# EAGLE board CT_schematic (EAGLE 7.6.0)

Size 100 x 80 mm. Coordinates in mm from the lower left corner, seen from the top.
Outline: 0,0 100,0 100,80 0,80 0,0
Copper layers (1*16): Top 0.035mm / dielectric 1.5mm / Bottom 0.035mm
Design rules "default": minimum track width 10mil, minimum drill 24mil, track to track 8mil, track to pad 8mil, pad to pad 8mil, via to via 8mil, smd to smd 8mil, copper to edge 40mil, drill to drill 8mil, minimum pad ring 10mil, minimum via ring 8mil, stop-mask expansion 4mil, vias tented up to drill 0mil, thermal gap 10mil

## Footprints (pad centres in the part's own frame; a part is rotated, then mirrored left to right if it is on the bottom)
C0603 = smd 0.8 x 0.8: 1 -0.762,0; 2 0.762,0
C0805 = smd 1.2 x 1.3: 1 -1.016,0; 2 1.016,0
C0402 = smd 0.5 x 0.5: 1 -0.508,0; 2 0.508,0
C1210 = smd 1.2 x 2.5: 1 -1.524,0; 2 1.524,0
EXV-9H = smd 3.505 x 1.676: 1 -2.857,0; 2 2.857,0
L0603 = smd 0.8 x 0.8: 1 -0.762,0; 2 0.762,0
L1210 = smd 1.2 x 2.5: 1 -1.524,0; 2 1.524,0
PJ-037B_PACKAGE = drill 3.7 square: 1 12,0 | drill 3.2 square: 2 6,0
R0603 = smd 0.8 x 0.8: 1 -0.762,0; 2 0.762,0
LQFP64 = smd 0.3 x 1.2: 1 -3.75,-5.75; 2 -3.25,-5.75; 3 -2.75,-5.75; 4 -2.25,-5.75; 5 -1.75,-5.75; 6 -1.25,-5.75; 7 -0.75,-5.75; 8 -0.25,-5.75; 9 0.25,-5.75; 10 0.75,-5.75; 11 1.25,-5.75; 12 1.75,-5.75; 13 2.25,-5.75; 14 2.75,-5.75; 15 3.25,-5.75; 16 3.75,-5.75; 33 3.75,5.75; 34 3.25,5.75; 35 2.75,5.75; 36 2.25,5.75; 37 1.75,5.75; 38 1.25,5.75; 39 0.75,5.75; 40 0.25,5.75; 41 -0.25,5.75; 42 -0.75,5.75; 43 -1.25,5.75; 44 -1.75,5.75; 45 -2.25,5.75; 46 -2.75,5.75; 47 -3.25,5.75; 48 -3.75,5.75 | smd 1.2 x 0.3: 17 5.75,-3.75; 18 5.75,-3.25; 19 5.75,-2.75; 20 5.75,-2.25; 21 5.75,-1.75; 22 5.75,-1.25; 23 5.75,-0.75; 24 5.75,-0.25; 25 5.75,0.25; 26 5.75,0.75; 27 5.75,1.25; 28 5.75,1.75; 29 5.75,2.25; 30 5.75,2.75; 31 5.75,3.25; 32 5.75,3.75; 49 -5.75,3.75; 50 -5.75,3.25; 51 -5.75,2.75; 52 -5.75,2.25; 53 -5.75,1.75; 54 -5.75,1.25; 55 -5.75,0.75; 56 -5.75,0.25; 57 -5.75,-0.25; 58 -5.75,-0.75; 59 -5.75,-1.25; 60 -5.75,-1.75; 61 -5.75,-2.25; 62 -5.75,-2.75; 63 -5.75,-3.25; 64 -5.75,-3.75
SSOP-16 = smd 1.981 x 0.356: 1 -2.464,2.223; 2 -2.464,1.587; 3 -2.464,0.953; 4 -2.464,0.318; 5 -2.464,-0.318; 6 -2.464,-0.953; 7 -2.464,-1.587; 8 -2.464,-2.223; 9 2.464,-2.223; 10 2.464,-1.587; 11 2.464,-0.953; 12 2.464,-0.318; 13 2.464,0.318; 14 2.464,0.953; 15 2.464,1.587; 16 2.464,2.223
HTSS-105-01-G-D = drill 1 pad 1.8 square: 1 0,0 | drill 1 pad 1.8: 2 0,2.54; 3 2.54,0; 4 2.54,2.54; 5 5.08,0; 6 5.08,2.54; 7 7.62,0; 8 7.62,2.54; 9 10.16,0; 10 10.16,2.54
ATBTLC1000-MR110CA = smd 2 x 0.5: 1 -7.2,2.7; 2 -7.2,1.8; 3 -7.2,0.9; 4 -7.2,0; 5 -7.2,-0.9; 6 -7.2,-1.8; 7 -7.2,-2.7; 8 -7.2,-3.6; 17 3.6,-3.6; 18 3.6,-2.7; 19 3.6,-1.8; 20 3.6,-0.9; 21 3.6,0; 22 3.6,0.9; 23 3.6,1.8; 24 3.6,2.7 | smd 0.5 x 2: 9 -4.255,-6.824; 10 -3.355,-6.824; 11 -2.455,-6.824; 12 -1.555,-6.824; 13 -0.655,-6.824; 14 0.245,-6.824; 15 1.145,-6.824; 16 2.045,-6.824 | smd 2.7 x 2.7: 25 -1.261,-0.328
QFN-32 = smd 0.6 x 0.3: 1 -2.3,1.75; 2 -2.3,1.25; 3 -2.3,0.75; 4 -2.3,0.25; 5 -2.3,-0.25; 6 -2.3,-0.75; 7 -2.3,-1.25; 8 -2.3,-1.75; 17 2.3,-1.75; 18 2.3,-1.25; 19 2.3,-0.75; 20 2.3,-0.25; 21 2.3,0.25; 22 2.3,0.75; 23 2.3,1.25; 24 2.3,1.75 | smd 0.3 x 0.6: 9 -1.75,-2.3; 10 -1.25,-2.3; 11 -0.75,-2.3; 12 -0.25,-2.3; 13 0.25,-2.3; 14 0.75,-2.3; 15 1.25,-2.3; 16 1.75,-2.3; 25 1.75,2.3; 26 1.25,2.3; 27 0.75,2.3; 28 0.25,2.3; 29 -0.25,2.3; 30 -0.75,2.3; 31 -1.25,2.3; 32 -1.75,2.3 | smd 3.2 x 3.2: EXP 0,0
SJ-43515TS-SMT-TR = smd 2.2 x 3: 1 0.6,-7.4; 4 3.4,-7.4 | smd 3 x 3: 2 12.8,-7.4; 5 17,-3 | smd 2 x 3: 3 5.3,0; 6 2.5,0 | drill 1.8: P$7 4.5,-3.69; P$8 11.54,-3.69
WM-64PC = drill 0.6 pad 1: 1 -1,0.95; 2 -1,-0.95
USB-A-H = drill 0.914: 1 2.718,3.493; 2 2.718,1.003; 3 2.718,-1.003; 4 2.718,-3.493 | drill 2.311: 5 0,-6.566; 6 0,6.566
SOT143B = smd 1 x 0.7: 1 -0.75,-1 | smd 0.6 x 0.7: 2 0.95,-1; 3 0.95,1; 4 -0.95,1
ASEK = smd 1.4 x 1: 1 -1.1,-0.8; 2 1.1,-0.8; 3 1.1,0.8; 4 -1.1,0.8
ASFL1 = smd 1.7 x 1.5: 1 -1.27,-1.1; 2 1.27,-1.1; 3 1.27,1.1; 4 -1.27,1.1
WSON-8 = smd 0.3 x 0.6: 1 -0.75,0; 2 0.05,0; 3 0.85,0; 4 1.65,0; 5 1.65,3.8; 6 0.85,3.8; 7 0.05,3.8; 8 -0.75,3.8 | smd 3 x 2.6: PAD 0.45,1.9
SON-6 = smd 0.55 x 0.3: 1 -0.355,0.5 | smd 0.52 x 0.3: 2 -0.37,0; 3 -0.37,-0.5; 4 0.37,-0.5; 5 0.37,0; 6 0.37,0.5
SW_4-1437565-2 = smd 1.4 x 2.1: 1 -2.23,4.55; 2 -2.23,-4.55; 3 2.23,4.55; 4 2.23,-4.55
LGM67K-G1J2-24-Z = smd 0.8 x 1.4: A -2,0; C 0,0
NC7SZ125M5X = smd 1.3 x 0.7: 1 -1.3,0.95; 2 -1.3,0; 3 -1.3,-0.95; 4 1.3,-0.95; 5 1.3,0.95

## Placement (x,y rotation side)
C1  1e-06  [C0603]  -67.31,80.01 0 top  (outside the outline)
C2  1e-07  [C0603]  -71.12,80.01 0 top  (outside the outline)
C3  1e-07  [C0603]  -74.93,80.01 0 top  (outside the outline)
C4  1e-07  [C0603]  -78.74,80.01 0 top  (outside the outline)
C5  1e-07  [C0603]  -82.55,80.01 0 top  (outside the outline)
C6  1e-07  [C0603]  -86.36,80.01 0 top  (outside the outline)
C7  4.7e-06  [C0603]  -59.69,80.01 0 top  (outside the outline)
C8  1e-08  [C0603]  -15.24,85.09 0 top  (outside the outline)
C9  1e-06  [C0603]  -19.05,85.09 0 top  (outside the outline)
C10  1e-06  [C0603]  -22.86,85.09 0 top  (outside the outline)
C11  1e-06  [C0603]  -26.67,85.09 0 top  (outside the outline)
C12  2.2e-07  [C0603]  -63.5,80.01 0 top  (outside the outline)
C13  1e-06  [C0603]  -30.48,85.09 0 top  (outside the outline)
C14  1e-06  [C0603]  -34.29,85.09 0 top  (outside the outline)
C15  1e-05  [C0805]  -69.85,72.39 0 top  (outside the outline)
C16  1e-05  [C0805]  -74.93,72.39 0 top  (outside the outline)
C17  1e-06  [C0603]  -38.1,85.09 0 top  (outside the outline)
C18  1e-06  [C0603]  -41.91,85.09 0 top  (outside the outline)
C19  1e-06  [C0603]  -45.72,85.09 0 top  (outside the outline)
C20  1e-06  [C0603]  -49.53,85.09 0 top  (outside the outline)
C21  1e-06  [C0603]  -53.34,85.09 0 top  (outside the outline)
C22  1e-06  [C0603]  -57.15,85.09 0 top  (outside the outline)
C23  1e-06  [C0603]  -60.96,85.09 0 top  (outside the outline)
C24  1e-07  [C0402]  -34.29,90.17 0 top  (outside the outline)
C25  1e-07  [C0402]  -38.1,90.17 0 top  (outside the outline)
C26  1e-07  [C0402]  -41.91,90.17 0 top  (outside the outline)
C27  1e-07  [C0402]  -45.72,90.17 0 top  (outside the outline)
C28  1e-06  [C0603]  -64.77,85.09 0 top  (outside the outline)
C29  1e-08  [C0402]  -49.53,90.17 0 top  (outside the outline)
C30  1e-08  [C0402]  -53.34,90.17 0 top  (outside the outline)
C31  1e-08  [C0402]  -57.15,90.17 0 top  (outside the outline)
C32  1e-08  [C0402]  -60.96,90.17 0 top  (outside the outline)
C33  1e-05  [C1210]  -39.37,72.39 0 top  (outside the outline)
C34  1e-05  [C0805]  -80.01,72.39 0 top  (outside the outline)
C35  1e-08  [C0402]  -64.77,90.17 0 top  (outside the outline)
C36  1e-05  [C1210]  -45.72,72.39 0 top  (outside the outline)
C37  1e-05  [C1210]  -52.07,72.39 0 top  (outside the outline)
C38  1e-07  [C0402]  -68.58,90.17 0 top  (outside the outline)
C39  0.0001  [EXV-9H]  -73.66,63.5 0 top  (outside the outline)
C40  0.0001  [EXV-9H]  -17.78,73.66 0 top  (outside the outline)
C41  1e-08  [C0402]  -72.39,90.17 0 top  (outside the outline)
F1  240.0  [L0603]  -68.58,85.09 0 top  (outside the outline)
I1  1e-05  [L1210]  -58.42,72.39 0 top  (outside the outline)
J1  PJ-037B  [PJ-037B_PACKAGE]  -83.82,29.21 0 top  (outside the outline)
R2  1000.0  [R0603]  -72.39,85.09 0 top  (outside the outline)
R4  4700.0  [R0603]  -76.2,85.09 0 top  (outside the outline)
R5  10000.0  [R0603]  -35.56,80.01 0 top  (outside the outline)
R6  100000.0  [R0603]  -85.09,71.12 0 top  (outside the outline)
R7  10000.0  [R0603]  -40.64,80.01 0 top  (outside the outline)
R8  10000.0  [R0603]  -45.72,80.01 0 top  (outside the outline)
R9  1270.0  [R0603]  -80.01,85.09 0 top  (outside the outline)
R10  1270.0  [R0603]  -83.82,85.09 0 top  (outside the outline)
R11  100000.0  [R0603]  -15.24,80.01 0 top  (outside the outline)
R12  200.0  [R0603]  -15.24,90.17 0 top  (outside the outline)
R13  1000.0  [R0603]  -19.05,90.17 0 top  (outside the outline)
R14  100000.0  [R0603]  -20.32,80.01 0 top  (outside the outline)
R15  2231.0  [R0603]  -22.86,90.17 0 top  (outside the outline)
R16  1000.0  [R0603]  -26.67,90.17 0 top  (outside the outline)
R17  10000.0  [R0603]  -50.8,80.01 0 top  (outside the outline)
R18  10000.0  [R0603]  -55.88,80.01 0 top  (outside the outline)
R19  9100.0  [R0603]  -30.48,90.17 0 top  (outside the outline)
R20  680000.0  [R0603]  -25.4,80.01 0 top  (outside the outline)
R21  120000.0  [R0603]  -30.48,80.01 0 top  (outside the outline)
U1  STM32F302RCT6  [LQFP64]  -24.13,43.18 0 top  (outside the outline)
U2  LTC2804CGN-1#PBF  [SSOP-16]  -66.04,41.91 0 top  (outside the outline)
U3  HTSS-105-01-G-D  [HTSS-105-01-G-D]  -43.18,53.34 0 top  (outside the outline)
U4  ATBTLC1000-MR110CA  [ATBTLC1000-MR110CA]  -17.78,8.89 0 top  (outside the outline)
U5  SGTL5000XNAA3  [QFN-32]  -22.86,54.61 0 top  (outside the outline)
U6  SJ-43515TS-SMT-TR  [SJ-43515TS-SMT-TR]  -78.74,10.16 0 top  (outside the outline)
U7  SJ-43515TS-SMT-TR  [SJ-43515TS-SMT-TR]  -39.37,31.75 0 top  (outside the outline)
U8  SJ-43515TS-SMT-TR  [SJ-43515TS-SMT-TR]  -67.31,31.75 0 top  (outside the outline)
U9  WM-64PCT  [WM-64PC]  -77.47,41.91 0 top  (outside the outline)
U10  61400416021  [USB-A-H]  -41.91,8.89 0 top  (outside the outline)
U11  prtr5v0u2ax  [SOT143B]  -85.09,90.17 0 top  (outside the outline)
U12  ASEK-32.768KHz-ECST  [ASEK]  -64.77,63.5 0 top  (outside the outline)
U13  ASFL-24.57MHZ-NCS  [ASFL1]  -27.94,64.77 0 top  (outside the outline)
U14  ASFL1-25MHZ-NCS  [ASFL1]  -44.45,64.77 0 top  (outside the outline)
U15  LP3878SDX-ADJ/NOPB  [WSON-8]  -63.5,53.34 0 top  (outside the outline)
U16  LP3878SDX-ADJ/NOPB  [WSON-8]  -83.82,53.34 0 top  (outside the outline)
U17  TPS3895ADRYR  [SON-6]  -13.97,93.98 0 top  (outside the outline)
U18  4-1437565-2  [SW_4-1437565-2]  -45.72,43.18 0 top  (outside the outline)
U19  Q65110A2395  [LGM67K-G1J2-24-Z]  -27.94,72.39 0 top  (outside the outline)
U20  nc7sz125m5x  [NC7SZ125M5X]  -63.5,71.12 0 top  (outside the outline)

## Library data of the parts
C1-C41 F1 I1 J1 R2 R4-R21 U1-U20 = circuit_tree

## Nets
CLK_U1_3: U1.3 U12.3
CLK_U1_5: U1.5 U14.3
CLK_U5_21: U5.21 U13.3
GND: C1.2 C2.2 C3.2 C4.2 C5.2 C6.2 C7.2 C8.2 C9.2 C10.2 C11.2 C13.2 C14.2 C15.2 C16.2 C24.2 C25.2 C26.2 C27.2 C28.2 C29.2 C30.2 C31.2 C32.2 C33.2 C34.2 C35.2 C36.2 C37.2 C38.2 C39.2 C40.2 C41.2 J1.2 R2.2 R5.2 R10.2 R13.2 R16.2 R19.2 R21.2 U1.12 U1.31 U1.47 U1.63 U2.8 U3.9 U4.1 U4.9 U4.13 U4.24 U4.25 U5.1 U5.3 U5.7 U5.EXP U7.1 U8.1 U9.2 U10.4 U10.5 U10.6 U11.1 U12.2 U13.2 U14.2 U15.3 U15.PAD U16.3 U16.PAD U17.2 U19.C U20.1 U20.3
NET_U1_7: R4.1 U1.7 U20.4
NET_U1_13: C8.1 C9.1 F1.1 U1.13
NET_U1_60: R5.1 U1.60
NET_U1_61: U19.A
NET_U1_62: U18.3 U18.4
NET_U2_6: C10.1 U2.6
NET_U2_7: C12.1 I1.2 U2.7
NET_U2_9: C11.1 U2.9
NET_U2_10: C12.2 U2.10
NET_U2_11: R6.1 U2.11
NET_U3_3: U2.1 U3.3
NET_U3_4: U2.2 U3.4
NET_U3_5: U2.3 U3.5
NET_U3_6: U2.4 U3.6
NET_U4_17: R7.1 U4.17
NET_U4_20: R8.1 U4.20
NET_U5_10: C27.1 U5.10
NET_U5_29: R9.1 U5.29
NET_U5_31: R10.1 U5.31
NET_U6_1: U5.4 U6.1
NET_U6_2: U5.2 U6.2
NET_U6_5: U5.6 U6.5
NET_U7_2: C18.1 U7.2
NET_U7_5: C17.1 U7.5
NET_U7_11: C18.2
NET_U7_12: C17.2
NET_U8_2: C20.1 C21.1 U8.2
NET_U8_5: C19.1 U8.5
NET_U8_13: C20.2 C21.2
NET_U8_14: C19.2
NET_U9_1: C22.1 C23.1 C28.1 U5.16 U9.1
NET_U9_15: C22.2 C23.2
NET_U11_4: U10.1 U11.4
NET_U15_1: C32.1 U15.1
NET_U15_6: R12.2 R13.1 U15.6
NET_U15_8: R11.1 U15.8
NET_U16_1: C35.1 U16.1
NET_U16_6: R15.2 R16.1 U16.6
NET_U16_8: R14.1 U16.8
NET_U17_1: R18.1 R19.1 U17.1
NET_U17_3: R20.2 R21.1 U17.3
NET_U17_4: R17.1 U17.4 U20.2
NET_U18_1: R2.1 U18.1 U18.2
PROC_I2S2_CK: U1.34 U5.24
PROC_I2S2_EXT_SD: U1.35 U5.25
PROC_I2S2_SD: U1.36 U5.26
PROC_I2S2_WS: U1.33 U5.23
PROC_SPI1_MISO: U1.22 U4.14
PROC_SPI1_MOSI: U1.23 U4.11
PROC_SPI1_NSS: U1.20 U4.12
PROC_SPI1_SCK: U1.21 U4.10
PROC_UART4_RX: U1.52 U2.16
PROC_UART4_TX: U1.51 U2.14
PROC_USB_DM: U1.44 U10.2 U11.3
PROC_USB_DP: U1.45 U10.3 U11.2
VCC_S1_15V3: C33.1 C36.1 C39.1 C40.1 J1.1 R11.2 R14.2 U15.4 U16.4
VCC_TIER1_1V2: C24.1 C34.1 R12.1 U5.30 U15.5
VCC_TIER1_3V3: C1.1 C2.1 C3.1 C4.1 C5.1 C6.1 C7.1 C13.1 C14.1 C15.1 C16.1 C25.1 C26.1 C29.1 C30.1 C31.1 C37.1 C38.1 C41.1 F1.2 I1.1 R4.2 R6.2 R7.2 R8.2 R9.2 R15.1 R17.2 R18.2 R20.1 U1.1 U1.19 U1.32 U1.48 U1.64 U2.5 U2.12 U4.6 U4.22 U5.5 U5.20 U12.4 U13.4 U14.4 U16.5 U17.6 U20.5

## Tracks (layer width: path | path; a pad name or v marks a point on that pad's centre or on a via)
CLK_U1_3  (1 unrouted)
CLK_U1_5  (1 unrouted)
CLK_U5_21  (1 unrouted)
GND  (73 unrouted)
NET_U1_7  (2 unrouted)
NET_U1_13  (3 unrouted)
NET_U1_60  (1 unrouted)
NET_U1_62  (1 unrouted)
NET_U2_6  (1 unrouted)
NET_U2_7  (2 unrouted)
NET_U2_9  (1 unrouted)
NET_U2_10  (1 unrouted)
NET_U2_11  (1 unrouted)
NET_U3_3  (1 unrouted)
NET_U3_4  (1 unrouted)
NET_U3_5  (1 unrouted)
NET_U3_6  (1 unrouted)
NET_U4_17  (1 unrouted)
NET_U4_20  (1 unrouted)
NET_U5_10  (1 unrouted)
NET_U5_29  (1 unrouted)
NET_U5_31  (1 unrouted)
NET_U6_1  (1 unrouted)
NET_U6_2  (1 unrouted)
NET_U6_5  (1 unrouted)
NET_U7_2  (1 unrouted)
NET_U7_5  (1 unrouted)
NET_U8_2  (2 unrouted)
NET_U8_5  (1 unrouted)
NET_U8_13  (1 unrouted)
NET_U9_1  (4 unrouted)
NET_U9_15  (1 unrouted)
NET_U11_4  (1 unrouted)
NET_U15_1  (1 unrouted)
NET_U15_6  (2 unrouted)
NET_U15_8  (1 unrouted)
NET_U16_1  (1 unrouted)
NET_U16_6  (2 unrouted)
NET_U16_8  (1 unrouted)
NET_U17_1  (2 unrouted)
NET_U17_3  (2 unrouted)
NET_U17_4  (2 unrouted)
NET_U18_1  (2 unrouted)
PROC_I2S2_CK  (1 unrouted)
PROC_I2S2_EXT_SD  (1 unrouted)
PROC_I2S2_SD  (1 unrouted)
PROC_I2S2_WS  (1 unrouted)
PROC_SPI1_MISO  (1 unrouted)
PROC_SPI1_MOSI  (1 unrouted)
PROC_SPI1_NSS  (1 unrouted)
PROC_SPI1_SCK  (1 unrouted)
PROC_UART4_RX  (1 unrouted)
PROC_UART4_TX  (1 unrouted)
PROC_USB_DM  (2 unrouted)
PROC_USB_DP  (2 unrouted)
VCC_S1_15V3  (8 unrouted)
VCC_TIER1_1V2  (4 unrouted)
VCC_TIER1_3V3  (46 unrouted)